# Altium PCB 基于51单片机万年历电子设计系统.PcbDoc
Units mm, origin at the board's own origin, x right, y up, seen from the top; angles counter-clockwise.
Board outline 100 x 100 mm, 2 copper layers (Top Layer, Bottom Layer); 26 components, 36 nets, 141 pads, 6 vias.
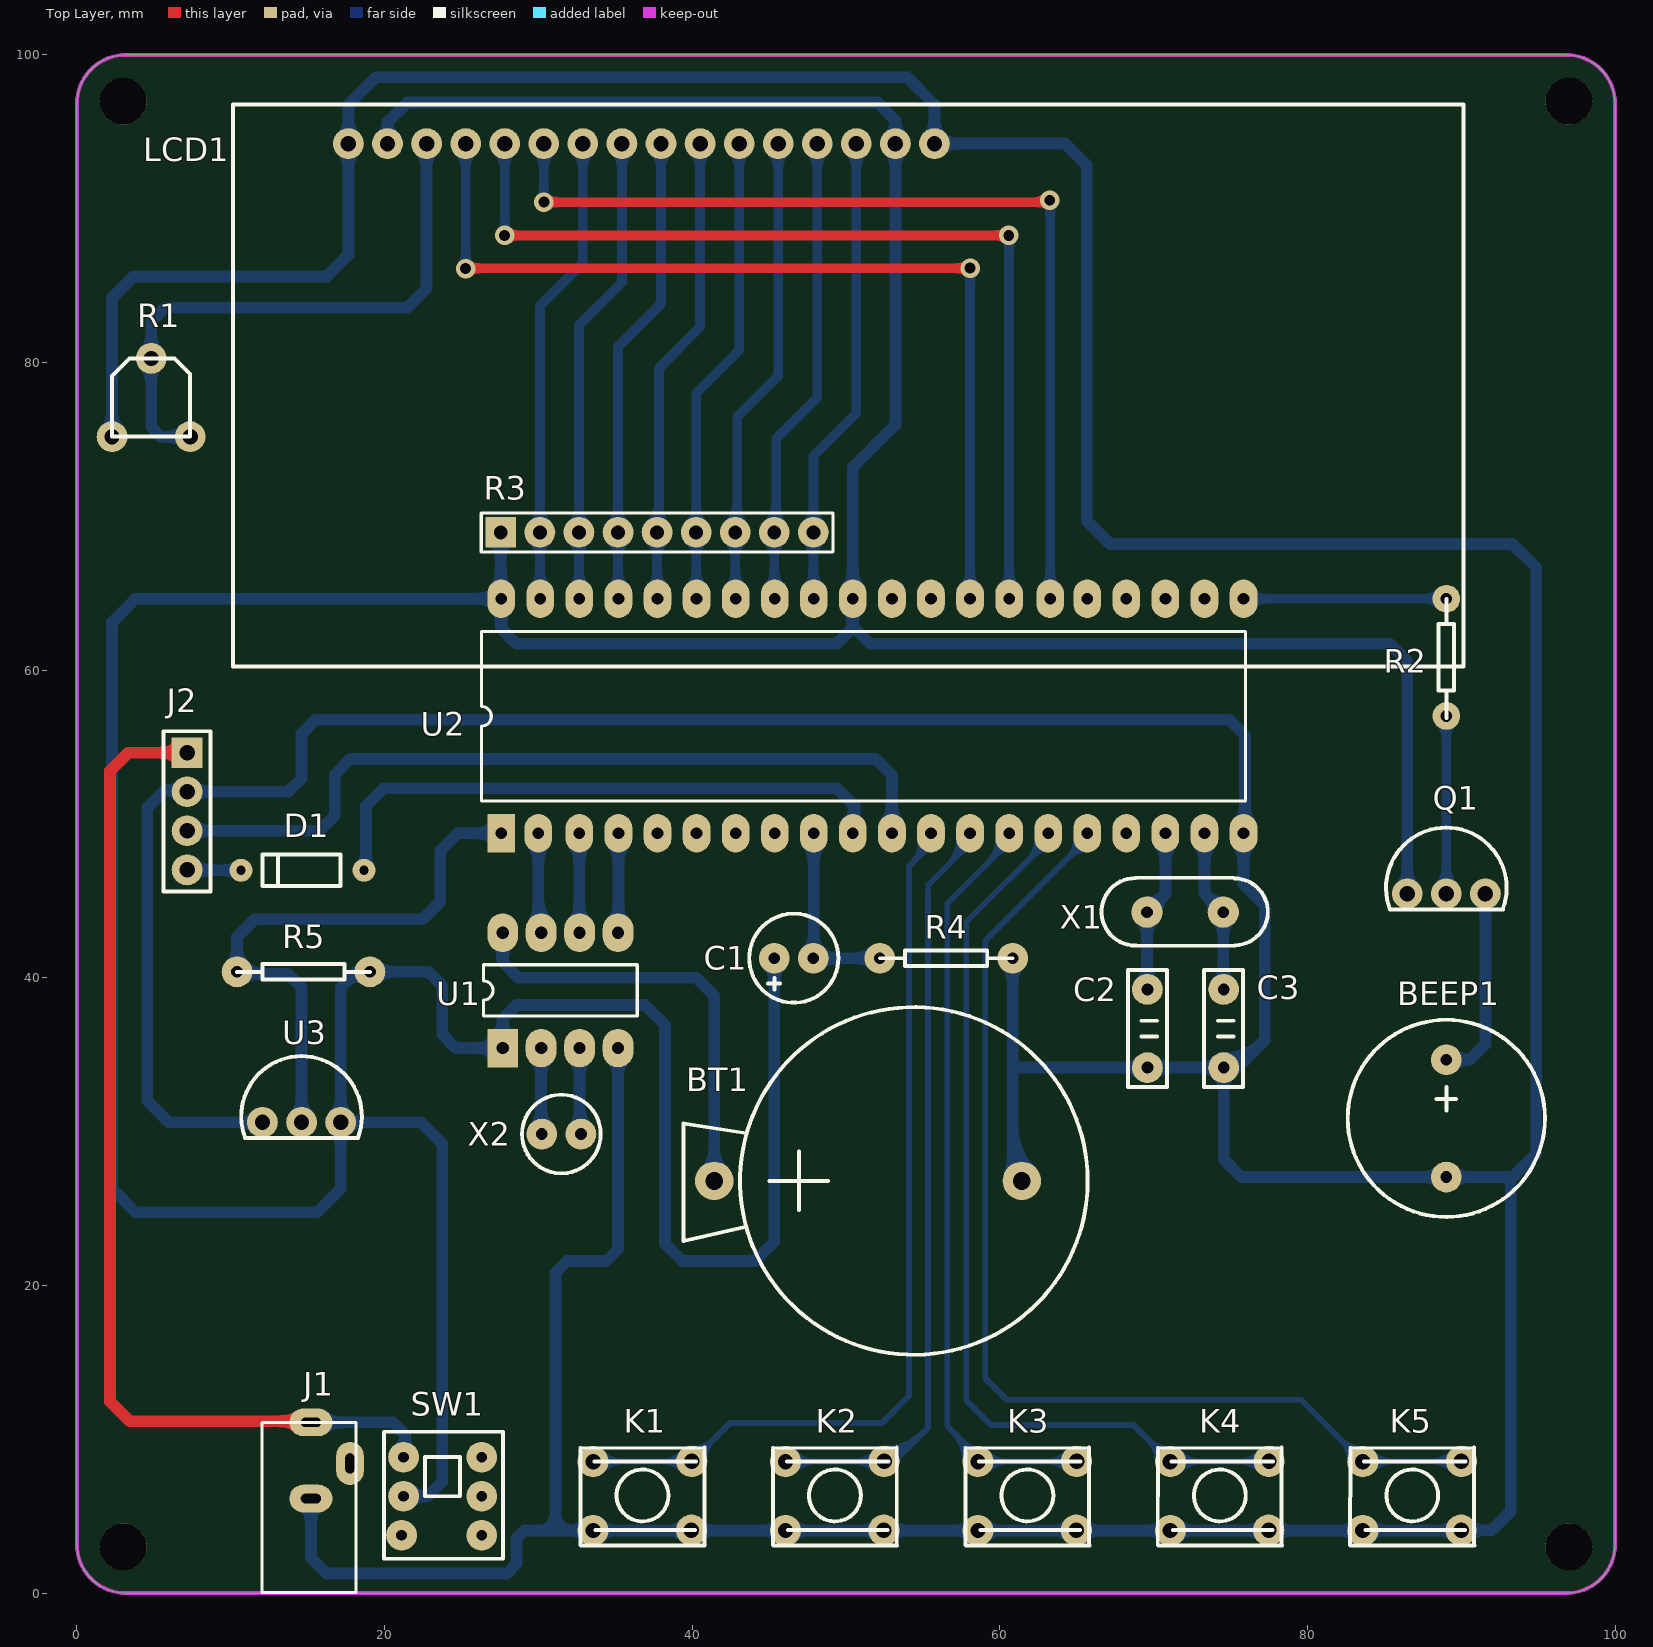
[diagram p0: Top Layer view]
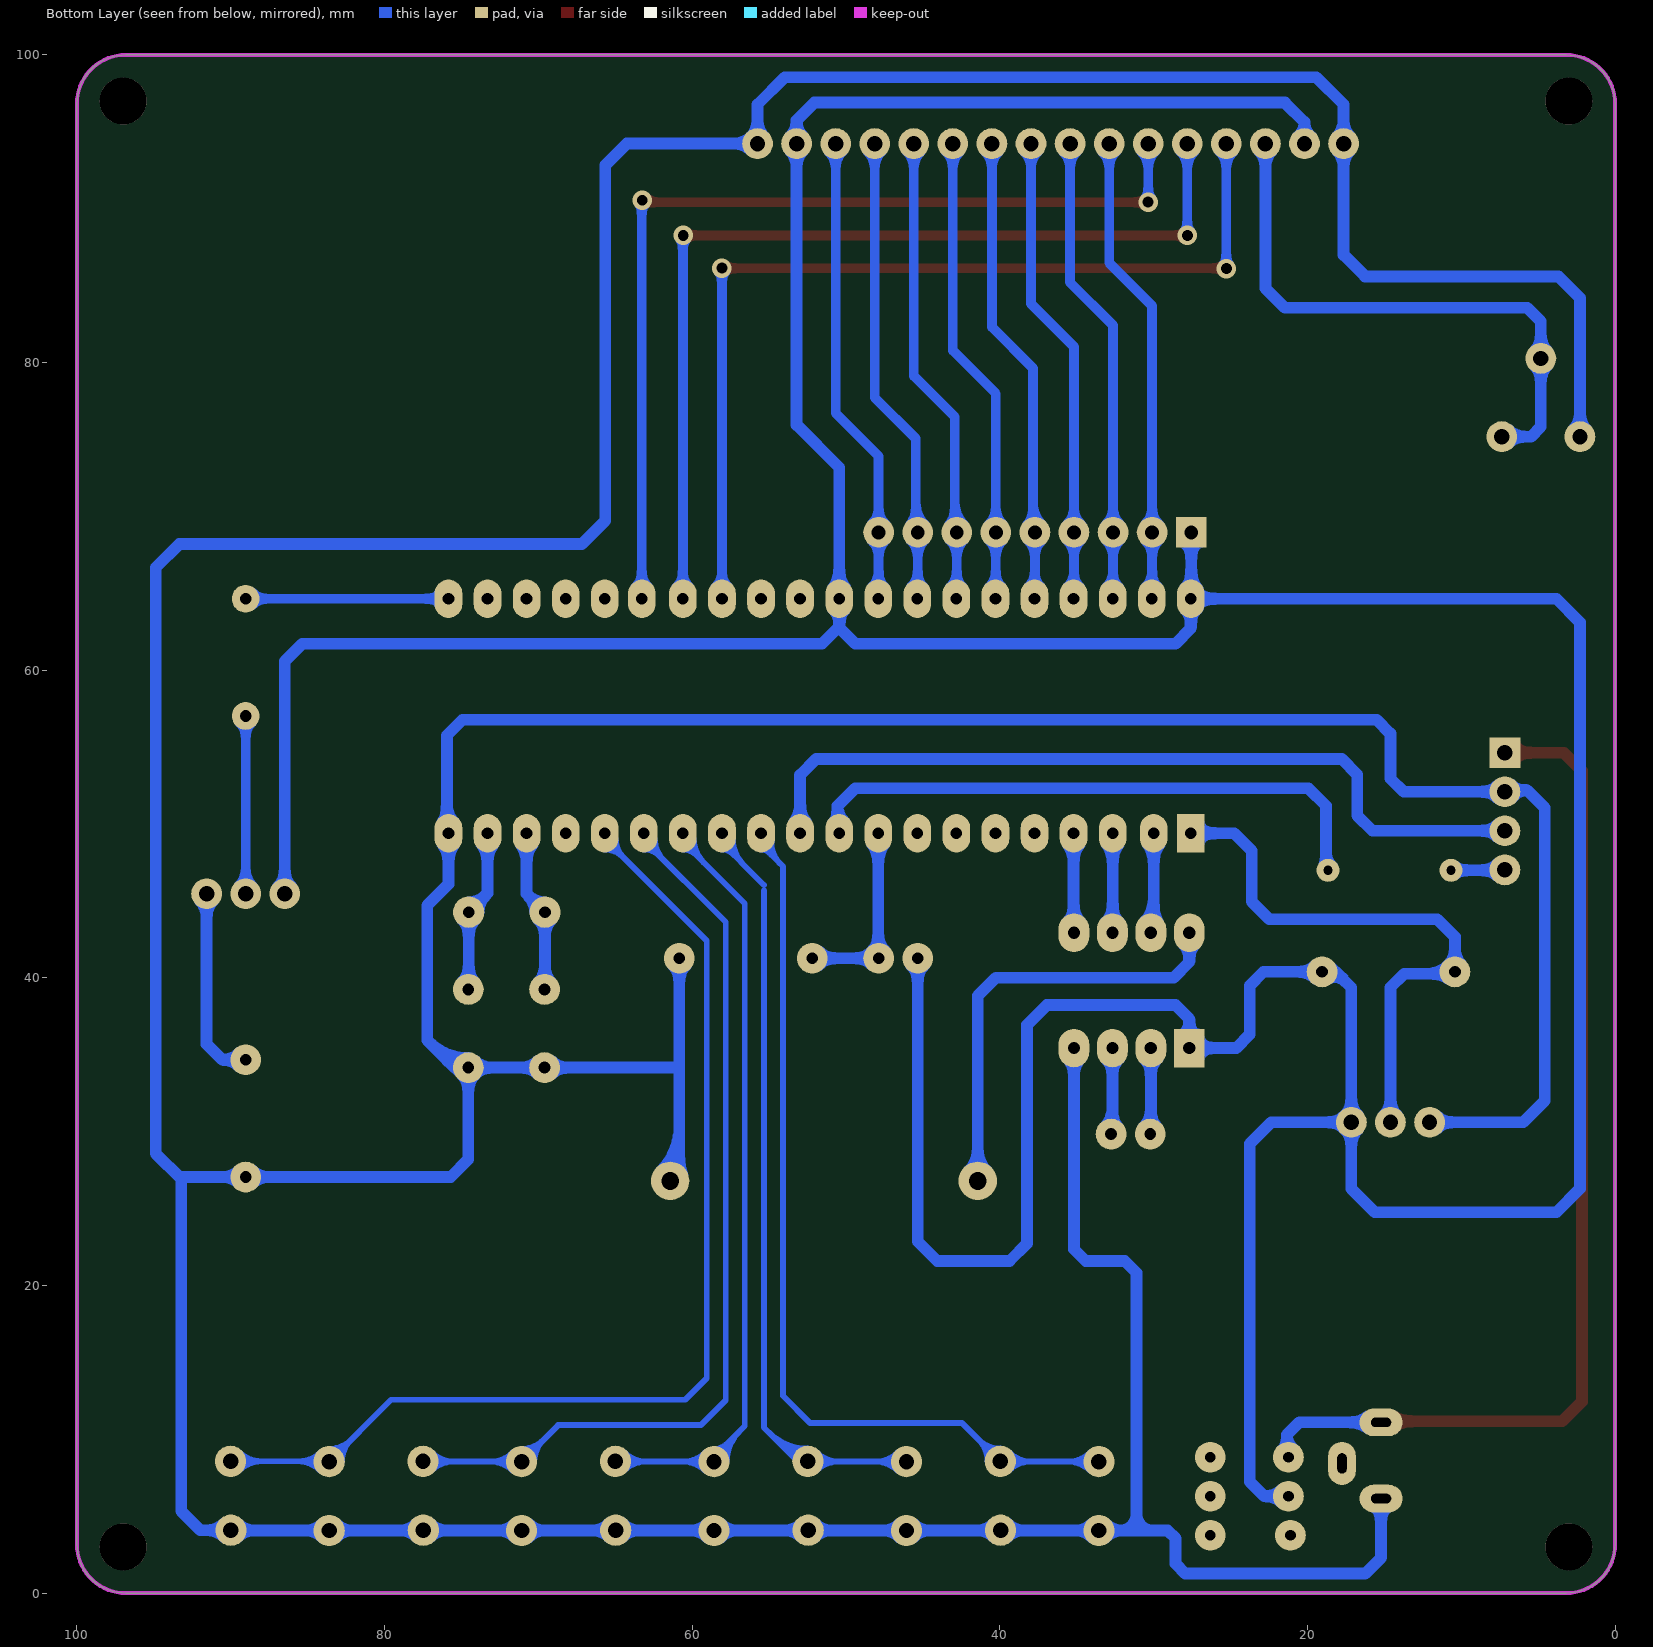
[diagram p1: Bottom Layer view, seen from below]

## Layer stack, top to bottom
Top Layer: signal copper 0.0356
Dielectric: dielectric 0.32, FR-4, Dk 4.8
Bottom Layer: signal copper 0.0356

## Board outline
0,3.175 0,96.825 cw(c3.175,96.825) 3.175,100 96.825,100 cw(c96.825,96.825) 100,96.825 100,3.175 cw(c96.825,3.175) 96.825,0 3.175,0 cw(c3.175,3.175)

## Design rules (kind name [scope] priority, off if disabled: settings)
Clearance [All] p1: gap=0.254
HoleSize [All] p1: absolutevalues=TRUE maxlimit=25.4 minlimit=0.025 maxpercent=80.000 minpercent=20.000
PolygonConnect [All] p1: connectstyle=Relief reliefconductorwidth=0.254 reliefentries=4 polygonreliefangle="90 Angle"
RoutingVias [All] p1: holewidth=0.711 width=1.27 viastyle="Through Hole" minholewidth=0.711 minwidth=1.27 maxholewidth=0.711 maxwidth=1.27
SilkToSilkClearance [All] p1: silktosilkclearance=0
SilkscreenOverComponentPads SilkToSolderMaskClearance [IsPad] p1: minsilkscreentomaskgap=0
SolderMaskExpansion [All] p1: expansion=0.102
Width [All] p1: maxlimit=2.032 minlimit=0.254 preferedwidth=0.635
25 further rules are at their usual default settings.

## Components (designator, comment, footprint, x,y, rotation, side; value= is the part's Value field where it differs from the comment)
BEEP1 "BEEP" BEEP 89.027,34.671 r270 top
BT1 "Battery" CR-2032 51.435,26.797 r0 top
C1 "10uF" CAP_2 45.339,41.275 r0 top
C2 "30pF" CAP 69.596,34.163 r90 top
C3 "30pF" CAP 74.549,34.163 r90 top
D1 "1N4148" 1N4148 18.668,46.99 r180 top
J1 "power" DC3.5 15.215,11.1 r270 top
J2 "SENSOR" SIP4 7.163,54.635 r270 top
K1 "KEY" SW2 36.83,5.588 r0 top
K2 "KEY" SW2 49.34,5.588 r0 top
K3 "KEY" SW2 61.849,5.588 r0 top
K4 "KEY" SW2 74.358,5.588 r0 top
K5 "KEY" SW2 86.868,5.588 r0 top
LCD1 "1602" 1602 17.653,94.234 r0 top
Q1 "S8550" PNP 86.487,45.466 r0 top
R1 "103" RES-B 2.286,75.184 r0 top
R2 "1K" RES#1 89.027,57.023 r90 top
R3 "103" SIP9 27.559,68.961 r0 top
R4 "10K" RES#2 61.595,41.275 r180 top
R5 "4.7K" RES#2 19.812,40.386 r180 top
SW1 "SWT" SWT 21.234,8.839 r0 top
U1 "DS1302" DIP8 27.679,35.433 r90 top
U2 "STC89C52" DIP40 27.584,49.403 r90 top
U3 "DS18B20" DS18B20 14.605,30.607 r0 top
X1 "12M" JZ 72.009,44.323 r180 top
X2 "32.768K" XTAL2 32.766,29.845 r180 top

## Footprints (in the part's own frame and the unit in brackets; to place one, negate y for a bottom-side part, rotate by r counter-clockwise, add the part's x,y. Pads: shape width x height; smd on the part's side, far side on the other; paste and mask are expansions set on the pad)
1N4148 [mm]
  round 1.5 hole 0.6: 1(0,0) 2(8,0)
  silkscreen extent 1.52,-1.02 6.6,1.02
1602 [mm]
  round 2 hole 1: 1(0,0) 2(2.54,0) 3(5.08,0) 4(7.62,0) 5(10.16,0) 6(12.7,0) 7(15.24,0) 8(17.78,0) 9(20.32,0) 10(22.86,0) 11(25.4,0) 12(27.94,0) 13(30.48,0) 14(33.02,0) 15(35.56,0) 16(38.1,0)
  silkscreen extent -7.5,-34 72.5,2.54
BEEP [mm]
  round 2 hole 0.762: 1(0,0) 2(7.62,0)
  silkscreen extent -2.6,-6.41 10.22,6.41
CAP [mm]
  round 2 hole 0.762: 1(0,0) 2(5.08,0)
  silkscreen extent -1.27,-1.27 6.35,1.27
CAP_2 [mm]
  round 2 hole 0.762: 1(0,0) 2(2.54,0)
  silkscreen extent -1.63,-2.89 4.17,2.89
CR-2032 [mm]
  round 2.5 hole 1.15: 1(-10,0) 2(10,0)
  silkscreen extent -12,-11.3 14.28,11.3
DC3.5 [mm]
  oval 1.8x2.8 hole 0.6 slot 1.3 at 90 deg: 1(0,0) 2(4.953,0)
  oval 2.8x1.8 hole 0.6 slot 1.3 at 0 deg: ""(2.667,2.54)
  silkscreen extent 0,-3.17 11.05,2.92
DIP8 [mm]
  rect 2.5x2 hole 0.8: 1(0,0)
  oval 2.5x2 hole 0.8: 2(0,-2.5) 3(0,-5) 4(0,-7.5) 5(7.5,-7.5) 6(7.5,-5) 7(7.5,-2.5) 8(7.5,0)
  silkscreen extent 2.08,-8.75 5.42,1.25
DIP40 [mm]
  rect 2.5x1.8 / inner rect 2.5x1.2 / far side rect 2.5x1.8 hole 0.762: 1(0,0)
  oval 2.5x1.8 / inner oval 2.5x1.2 / far side oval 2.5x1.8 hole 0.762: 2(0,-2.413) 3(0,-5.08) 4(0,-7.62) 5(0,-10.16) 6(0,-12.7) 7(0,-15.24) 8(0,-17.78) 9(0,-20.32) 10(0,-22.86) 11(0,-25.4) 12(0,-27.94) 13(0,-30.48) 14(0,-33.02) 15(0,-35.56) 16(0,-38.1) 17(0,-40.64) 18(0,-43.18) 19(0,-45.72) 20(0,-48.26) 21(15.24,-48.26) 22(15.24,-45.72) 23(15.24,-43.18) 24(15.24,-40.64) 25(15.24,-38.1) 26(15.24,-35.687) 27(15.24,-33.02) 28(15.24,-30.48) 29(15.24,-27.94) 30(15.24,-25.4) 31(15.24,-22.86) 32(15.24,-20.32) 33(15.24,-17.78) 34(15.24,-15.24) 35(15.24,-12.7) 36(15.24,-10.16) 37(15.24,-7.62) 38(15.24,-5.08) 39(15.24,-2.54) 40(15.24,0)
  silkscreen extent 2.08,-48.39 13.12,1.29
DS18B20 [mm]
  round 2 hole 1: 1(-2.54,0) 2(0,0) 3(2.54,0)
  silkscreen extent -3.92,-1.01 3.92,4.3
JZ [mil]
  round 80 hole 30: 1(-99.09,2.16) 2(95.91,2.16)
  silkscreen extent -213,-86 212,88
PNP [mm]
  round 2 hole 1: B(2.54,0) C(5.08,0) E(0,0)
  silkscreen extent -1.38,-1.01 6.46,4.3
RES#1 [mm]
  round 1.8 hole 0.762: 1(0,0) 2(7.62,0)
  silkscreen extent -0.13,-0.51 7.62,0.51
RES#2 [mm]
  round 2 hole 0.762: 1(0.762,0) 2(9.398,0)
  silkscreen extent 0.76,-0.51 9.4,0.51
RES-B [mm]
  round 2 hole 1: 1(0,0) 2(5.08,0) 3(2.54,5.08)
  silkscreen extent 0,0 5.08,5.08
SIP4 [mm]
  rect 2x2 hole 1: 1(0,0)
  round 2 hole 1: 2(2.54,0) 3(5.08,0) 4(7.62,0)
  silkscreen extent -1.4,-1.52 9.02,1.52
SIP9 [mm]
  rect 2x2 hole 0.9: 1(0,0)
  round 2 hole 0.9: 2(2.54,0) 3(5.08,0) 4(7.62,0) 5(10.16,0) 6(12.7,0) 7(15.24,0) 8(17.78,0) 9(20.32,0)
  silkscreen extent -1.27,-1.27 21.59,1.27
SW2 [mm]
  round 2.032 hole 1: 1(-3.27,-1.52) 1(3.12,-1.5) 2(-3.27,2.96) 2(3.14,2.98)
  silkscreen extent -4.09,-2.5 3.98,3.88
SWT [mm]
  round 2 hole 0.7: 1(0,0) 2(0,-2.54) 3(-0.127,-5.08) 4(5.08,-5.08) 5(5.08,-2.54) 6(5.08,0)
  silkscreen extent -1.27,-6.6 6.48,1.65
XTAL2 [mm]
  round 2 hole 0.762: 1(0,0) 2(2.54,0)
  silkscreen extent -1.29,-2.55 3.83,2.55

## Part data
C1: library part CAP_2
C2 C3: library part CAP
J1: library part DC5.5
J2: library part CON4
Q1: library part PNP
R1: library part RES-B
R2 R4 R5: library part Res
R3: library part Header9
X1 X2: library part XTAL

## Free pads (board coordinates)
  round 3.05 hole 3.05: ""(3,3) ""(3,97) ""(97,3) ""(97,97)

## Via types
v1: diameter 1.27, hole 0.711, Top Layer to Bottom Layer, 6 vias

## Nets (pads, with @x,y where several pads share a name; then routed paths per layer and width w, separated by ;. In a path a pad name is that pad's centre, name@x,y a point inside that pad or via, vN(x,y) a via of type N, cw(c..) or ccw(c..) an arc to the next point about the centre after c; other vN are vias at no path point)
+5V: J1.1 J2.1 SW1.1 | length 76.4
  Top Layer w0.762: J2.1@6.725,54.198 ccw(c5.668,53.141) 5.668,54.635 ccw(c5.668,56.13) J2.1@6.725,55.073 ; J2.1 3.327,54.635 2.159,53.467 2.159,12.446 3.429,11.176 15.138,11.176 J1.1 ; 13.278,11.176 cw(c13.278,9.663) J1.1@14.348,10.733 ; 13.646,11.176 ccw(c13.646,12.169) J1.1@14.348,11.467
  Bottom Layer w0.762: J1.1 20.523,11.1 21.336,10.287 ; J1.1@16.082,10.733 cw(c16.968,9.847) 16.968,11.1 cw(c16.968,12.353) J1.1@16.082,11.467 ; SW1.1@20.861,9.333 ccw(c20.14,10.287) 21.336,10.287 ; SW1.1 21.336,8.941 21.336,10.287 ; 21.336,10.088 ccw(c22.484,10.088) SW1.1@21.672,9.277
BEEP: R2.2 U2.21 | length 17.6
  Bottom Layer w0.635: U2.21 R2.2 ; U2.21@76.256,64.231 cw(c77.251,63.237) 77.251,64.643 cw(c77.251,66.049) U2.21@76.256,65.055 ; R2.2@88.615,64.231 ccw(c87.621,63.237) 87.621,64.643 ccw(c87.621,66.049) R2.2@88.615,65.055
DQ: R5.2 U2.1 U3.2 | length 46.6
  Bottom Layer w0.762: R5.2@9.976,40.824 ccw(c8.92,41.88) 10.414,41.88 ccw(c11.908,41.88) 10.852,40.824 ccw(c12.215,42.187) 12.215,40.259 ; R5.2@10.852,39.948 cw(c11.602,39.198) 11.602,40.259 ; U3.2@14.167,31.045 ccw(c13.111,32.101) 14.605,32.101 ccw(c16.099,32.101) U3.2@15.043,31.045 ; U3.2 14.605,39.37 13.716,40.259 10.541,40.259 R5.2 10.414,42.672 11.557,43.815 22.479,43.815 23.622,44.958 23.622,48.26 24.765,49.403 U2.1 ; U2.1@27.217,49.036 ccw(c26.331,48.15) 26.331,49.403 ccw(c26.331,50.656) U2.1@27.217,49.77
EN: LCD1.6 U2.26 | length 72
  Top Layer w0.635: v1(30.353,90.424) v1@63.271,90.424 ; v1@30.578,90.199 cw(c31.12,89.657) 31.12,90.424 cw(c31.12,91.191) v1@30.578,90.649 ; 62.173,90.424 ccw(c62.173,91.624) v1@63.021,90.776
  Bottom Layer w0.635: LCD1.6@29.87,93.751 cw(c28.705,92.586) 30.353,92.586 cw(c32.001,92.586) LCD1.6@30.836,93.751 ; v1@30.128,90.649 ccw(c29.586,91.191) 30.353,91.191 ccw(c31.12,91.191) v1@30.578,90.649 ; v1(30.353,90.424) LCD1.6 ; U2.26@62.86,65.405 ccw(c61.865,66.399) 63.271,66.399 ccw(c64.678,66.399) U2.26@63.683,65.405 ; v1@63.021,90.326 cw(c62.418,89.723) 63.271,89.723 ; v1(63.246,90.551) 63.271,90.526 U2.26 ; 63.271,89.846 cw(c63.951,89.846) v1@63.471,90.326
GND: BEEP1.2 BT1.2 C2.1 C3.1 J1.2 J2.2 K1.1 K2.1 K3.1 K4.1 K5.1 LCD1.1 LCD1.16 R1.1 R4.1 U1.4 U2.20 U3.1 | length 607.9
  Bottom Layer w0.762: R1.1@1.848,75.622 ccw(c0.792,76.678) 2.286,76.678 ccw(c3.78,76.678) R1.1@2.724,75.622 ; R1.1 2.286,84.201 3.683,85.598 16.256,85.598 17.653,86.995 LCD1.1 17.653,96.774 19.431,98.552 53.975,98.552 55.753,96.774 LCD1.16 64.262,94.234 65.659,92.837 65.659,69.723 67.183,68.199 93.345,68.199 94.869,66.675 94.869,28.575 93.218,26.924 93.218,5.334 91.972,4.088 89.988,4.088 89.968,4.068 83.598,4.068 K1.1@33.56,4.068 ; 5.914,52.197 ccw(c5.914,53.345) J2.2@6.725,52.533 ; J2.2@6.669,51.722 ccw(c5.715,51.001) 5.715,52.197 ; J2.2@7.6,51.658 cw(c8.657,50.601) 8.657,52.095 cw(c8.657,53.59) J2.2@7.6,52.533 ; U3.1@11.627,30.169 ccw(c10.571,29.113) 10.571,30.607 ccw(c10.571,32.101) U3.1@11.627,31.045 ; U3.1 5.969,30.607 4.572,32.004 4.572,51.054 5.715,52.197 ; J1.2@14.848,5.78 cw(c13.962,4.894) 15.215,4.894 cw(c16.468,4.894) J1.2@15.582,5.78 ; J1.2 15.215,2.311 16.256,1.27 27.94,1.27 28.575,1.905 28.575,3.556 29.087,4.068 31.115,4.068 ; LCD1.1@17.215,93.796 cw(c16.159,92.74) 17.653,92.74 cw(c19.147,92.74) LCD1.1@18.091,93.796 ; LCD1.1@17.215,94.672 ccw(c16.159,95.728) 17.653,95.728 ccw(c19.147,95.728) LCD1.1@18.091,94.672 ; K1.1@33.111,3.619 ccw(c32.027,2.535) 32.027,4.068 ccw(c32.027,5.601) K1.1@33.111,4.517 ; K1.1@34.009,3.619 cw(c35.093,2.535) 35.093,4.068 cw(c35.093,5.601) K1.1@34.009,4.517 ; K1.1@34.011,3.621 cw(c35.084,2.557) 35.084,4.068 ; K1.1@34.011,4.515 ccw(c35.084,5.579) 35.084,4.068 ; U1.4@34.741,34.745 cw(c33.685,33.689) 35.179,33.689 cw(c36.673,33.689) U1.4@35.617,34.745 ; U1.4 35.179,22.352 34.417,21.59 31.877,21.59 31.115,20.828 31.115,4.068 ; 38.369,4.068 ccw(c38.369,5.669) K1.1@39.501,4.537 ; 38.465,4.068 cw(c38.465,2.603) K1.1@39.501,3.639 ; K1.1@40.399,3.639 cw(c41.435,2.603) 41.435,4.068 ; K1.1@40.399,4.537 ccw(c41.531,5.669) 41.531,4.068 ; K2.1@45.62,3.619 ccw(c44.536,2.535) 44.536,4.068 ccw(c44.536,5.601) K2.1@45.62,4.517 ; K2.1@46.519,3.619 cw(c47.603,2.535) 47.603,4.068 cw(c47.603,5.601) K2.1@46.519,4.517 ; 50.878,4.068 ccw(c50.878,5.669) K2.1@52.01,4.537 ; 50.975,4.068 cw(c50.975,2.603) K2.1@52.01,3.639 ; K2.1@52.909,3.639 cw(c53.944,2.603) 53.944,4.068 ; K2.1@52.909,4.537 ccw(c54.041,5.669) 54.041,4.068 ; LCD1.16@55.315,94.672 ccw(c54.259,95.728) 55.753,95.728 ccw(c57.247,95.728) 56.191,94.672 ccw(c57.247,95.728) 57.247,94.234 ccw(c57.247,92.74) LCD1.16@56.191,93.796 ; K3.1@58.13,3.619 ccw(c57.046,2.535) 57.046,4.068 ccw(c57.046,5.601) K3.1@58.13,4.517 ; K3.1@59.028,3.619 cw(c60.112,2.535) 60.112,4.068 cw(c60.112,5.601) K3.1@59.028,4.517 ; R4.1@60.395,40.837 cw(c59.339,39.781) 60.833,39.781 cw(c62.327,39.781) R4.1@61.271,40.837 ; 60.833,28.509 ccw(c63.147,28.509) BT1.2@61.511,26.873 ; 60.833,30.348 ccw(c64.986,30.348) BT1.2@62.049,27.411 ; R4.1 60.833,34.036 ; BT1.2 60.833,27.399 60.833,34.036 ; 63.388,4.068 ccw(c63.388,5.669) K3.1@64.52,4.537 ; 63.484,4.068 cw(c63.484,2.603) K3.1@64.52,3.639 ; K3.1@65.418,3.639 cw(c66.454,2.603) 66.454,4.068 ; K3.1@65.418,4.537 ccw(c66.55,5.669) 66.55,4.068 ; C2.1@69.158,33.725 ccw(c68.102,32.669) 68.102,34.163 ccw(c68.102,35.657) C2.1@69.158,34.601 ; C2.1@70.034,33.725 cw(c71.09,32.669) 71.09,34.163 cw(c71.09,35.657) C2.1@70.034,34.601 ; K4.1@70.639,3.619 ccw(c69.555,2.535) 69.555,4.068 ccw(c69.555,5.601) K4.1@70.639,4.517 ; K4.1@71.538,3.619 cw(c72.622,2.535) 72.622,4.068 cw(c72.622,5.601) K4.1@71.538,4.517 ; C3.1@74.111,34.601 cw(c73.055,35.657) 73.055,34.163 cw(c73.055,32.669) 74.111,33.725 cw(c73.055,32.669) 74.549,32.669 cw(c76.043,32.669) C3.1@74.987,33.725 ; C3.1@74.549,34.02 ccw(c74.549,35.821) 75.823,34.548 ; C3.1@74.549,34.782 ccw(c74.549,38.423) 77.123,35.848 ; U2.20@75.477,48.686 cw(c74.591,47.8) 75.844,47.8 cw(c77.097,47.8) U2.20@76.211,48.686 ; U2.20@75.477,50.12 ccw(c74.346,51.251) 75.946,51.251 ; 75.897,4.068 ccw(c75.897,5.669) K4.1@77.029,4.537 ; 75.946,50.761 ccw(c76.852,50.761) U2.20@76.211,50.12 ; 75.994,4.068 cw(c75.994,2.603) K4.1@77.029,3.639 ; K4.1@77.928,3.639 cw(c78.963,2.603) 78.963,4.068 ; K4.1@77.928,4.537 ccw(c79.06,5.669) 79.06,4.068 ; K5.1@83.149,3.619 ccw(c82.065,2.535) 82.065,4.068 ccw(c82.065,5.601) K5.1@83.149,4.517 ; K5.1@84.047,3.619 cw(c85.131,2.535) 85.131,4.068 cw(c85.131,5.601) K5.1@84.047,4.517 ; 88.407,4.068 ccw(c88.407,5.669) K5.1@89.539,4.537 ; 88.503,4.068 cw(c88.503,2.603) K5.1@89.539,3.639 ; BEEP1.2@88.589,26.613 ccw(c87.533,25.557) 87.533,27.051 ccw(c87.533,28.545) BEEP1.2@88.589,27.489 ; BEEP1.2@89.465,26.613 cw(c90.521,25.557) 90.521,27.051 cw(c90.521,28.545) BEEP1.2@89.465,27.489 ; K5.1@90.437,3.639 cw(c91.521,2.555) 91.521,4.088 cw(c91.521,5.621) K5.1@90.437,4.537 ; 93.091,27.051 BEEP1.2 75.692,27.051 74.549,28.194 C3.1 ; 5.715,52.197 7.061,52.197 J2.2 13.741,52.095 14.605,52.959 14.605,55.88 15.494,56.769 74.93,56.769 75.946,55.753 75.946,49.505 U2.20 75.844,46.076 77.216,44.704 77.216,35.941 75.438,34.163 C3.1 ; 31.115,4.068 K1.1@33.56,4.068 ; K1.1@33.56,4.068 35.084,4.068 ; 60.833,34.036 60.96,34.163 C2.1 C3.1
IO: U1.6 U2.3 | length 10.8
  Bottom Layer w0.762: U1.6@32.241,43.621 ccw(c31.22,44.642) 32.664,44.642 ; U2.3@32.297,48.686 cw(c31.411,47.8) 32.664,47.8 cw(c33.917,47.8) U2.3@33.031,48.686 ; 32.664,44.713 ccw(c34.209,44.713) U1.6@33.117,43.621 ; U2.3 32.664,42.948 U1.6
KEY1: K1.2 U2.12 | length 77.4
  Bottom Layer w0.381: K1.2@33.56,8.548 39.95,8.548 K1.2@39.97,8.568 ; K1.2@33.874,8.234 cw(c34.633,7.475) 34.633,8.548 cw(c34.633,9.621) K1.2@33.874,8.862 ; K1.2@34.144,7.964 cw(c35.553,6.555) 35.553,8.548 cw(c35.553,10.541) K1.2@34.144,9.132 ; 37.929,8.548 ccw(c37.929,10.609) K1.2@39.386,9.152 ; 38.025,8.548 cw(c38.025,6.623) K1.2@39.386,7.984 ; 38.849,8.548 ccw(c38.849,9.689) K1.2@39.656,8.882 ; 38.945,8.548 cw(c38.945,7.543) K1.2@39.656,8.254 ; K1.2@39.97,9.013 ccw(c39.97,10.086) 40.729,9.327 ccw(c41.488,8.568) K1.2@40.414,8.568 ; K1.2@39.97,9.394 ccw(c39.97,11.386) 41.379,9.977 ccw(c42.788,8.568) K1.2@40.795,8.568 ; K1.2@40.029,8.568 K1.2@39.97,8.568 ; 54.295,47.437 ccw(c52.994,48.739) U2.12@54.82,48.966 ; 54.847,47.989 ccw(c53.975,48.86) U2.12@55.198,49.012 ; 54.973,48.115 cw(c55.524,47.564) U2.12@55.524,48.343 ; U2.12 55.524,48.666 54.102,47.244 54.102,12.827 52.324,11.049 42.451,11.049 K1.2@39.97,8.568
KEY2: K2.2 U2.13 | length 70.9
  Bottom Layer w0.381: K2.2@46.07,8.548 52.459,8.548 52.479,8.568 53.145,8.568 55.34,10.763 55.34,44.196 ; K2.2@46.384,8.234 cw(c47.143,7.475) 47.143,8.548 cw(c47.143,9.621) K2.2@46.384,8.862 ; K2.2@46.653,7.964 cw(c48.062,6.555) 48.062,8.548 cw(c48.062,10.541) K2.2@46.653,9.132 ; 50.438,8.548 ccw(c50.438,10.609) K2.2@51.896,9.152 ; 50.535,8.548 cw(c50.535,6.623) K2.2@51.896,7.984 ; 51.358,8.548 ccw(c51.358,9.689) K2.2@52.165,8.882 ; 51.455,8.548 cw(c51.455,7.543) K2.2@52.165,8.254 ; K2.2@52.479,8.632 ccw(c52.479,10.391) 53.724,9.147 ; K2.2@52.479,9.013 ccw(c52.479,11.692) 54.374,9.797 ; K2.2@52.479,9.394 ccw(c52.479,12.993) 55.025,10.448 ; 55.34,45.339 55.34,44.196 ; 55.34,45.688 55.34,44.196 ; 55.34,46.038 U2.13@58.064,48.762 ; 56.647,47.344 ccw(c54.939,49.053) U2.13@57.355,49.053 ; 57.298,47.995 ccw(c56.239,49.053) U2.13@57.736,49.053 ; 57.351,48.048 cw(c58.064,47.334) U2.13@58.064,48.343 ; U2.13@58.064,48.412 U2.13
KEY3: K3.2 U2.14 | length 67.7
  Bottom Layer w0.381: 56.578,43.815 56.578,42.799 ; 56.578,44.767 56.578,42.799 ; 56.578,44.831 U2.14@60.604,48.857 ; 56.951,10.486 cw(c55.012,8.548) K3.2@57.754,8.548 ; 57.601,9.836 cw(c56.313,8.548) K3.2@58.135,8.548 ; 57.699,9.738 ccw(c58.579,10.618) K3.2@58.579,9.373 ; K3.2@58.579,8.548 58.579,8.858 56.578,10.858 56.578,42.799 ; K3.2@58.893,8.234 cw(c59.652,7.475) 59.652,8.548 cw(c59.652,9.621) K3.2@58.893,8.862 ; K3.2@59.163,7.964 cw(c60.572,6.555) 60.572,8.548 cw(c60.572,10.541) K3.2@59.163,9.132 ; 59.255,47.507 ccw(c57.709,49.053) U2.14@59.895,49.053 ; K3.2@59.524,8.548 64.969,8.548 K3.2@64.989,8.568 ; 59.728,47.98 cw(c60.604,47.104) U2.14@60.604,48.343 ; 59.905,48.157 ccw(c59.009,49.053) U2.14@60.276,49.053 ; U2.14@60.604,48.793 U2.14 ; 62.948,8.548 ccw(c62.948,10.609) K3.2@64.405,9.152 ; 63.044,8.548 cw(c63.044,6.623) K3.2@64.405,7.984 ; 63.868,8.548 ccw(c63.868,9.689) K3.2@64.675,8.882 ; 63.964,8.548 cw(c63.964,7.543) K3.2@64.675,8.254
KEY4: K4.2 U2.15 | length 80
  Bottom Layer w0.381: 57.817,13.335 57.817,14.478 ; 57.817,42.672 57.817,42.164 ; 57.817,43.593 57.817,42.164 ; 57.817,43.624 U2.15@63.144,48.952 ; 61.862,47.67 ccw(c60.479,49.053) U2.15@62.435,49.053 ; 62.105,47.913 cw(c63.144,46.874) U2.15@63.144,48.343 ; 62.512,48.32 ccw(c61.779,49.053) U2.15@62.816,49.053 ; U2.15@63.144,48.92 U2.15 ; K4.2@70.263,8.548 ccw(c68.27,8.548) 69.679,9.957 ccw(c71.089,11.366) K4.2@71.089,9.373 ; K4.2@70.644,8.548 ccw(c69.571,8.548) 70.33,9.307 ccw(c71.089,10.066) K4.2@71.089,8.992 ; K4.2@71.403,8.234 cw(c72.162,7.475) 72.162,8.548 cw(c72.162,9.621) K4.2@71.403,8.862 ; K4.2@71.672,7.964 cw(c73.081,6.555) 73.081,8.548 cw(c73.081,10.541) K4.2@71.672,9.132 ; 75.457,8.548 ccw(c75.457,10.609) K4.2@76.915,9.152 ; 75.554,8.548 cw(c75.554,6.623) K4.2@76.915,7.984 ; 76.377,8.548 ccw(c76.377,9.689) K4.2@77.184,8.882 ; 76.474,8.548 cw(c76.474,7.543) K4.2@77.184,8.254 ; K4.2@77.498,8.568 77.478,8.548 71.089,8.548 68.714,10.922 59.436,10.922 57.817,12.541 57.817,14.478 ; 57.817,14.478 57.817,42.164
KEY5: K5.2 U2.16 | length 88.5
  Bottom Layer w0.381: 64.469,47.832 ccw(c63.249,49.053) U2.16@64.975,49.053 ; 64.483,47.846 cw(c65.684,46.644) U2.16@65.684,48.343 ; U2.16 65.684,49.047 59.055,42.418 59.055,13.97 60.452,12.573 79.573,12.573 83.598,8.548 83.618,8.568 K5.2@90.008,8.568 ; K5.2@82.773,8.548 ccw(c80.78,8.548) 82.189,9.957 ccw(c83.598,11.366) K5.2@83.598,9.373 ; K5.2@83.154,8.548 ccw(c82.08,8.548) 82.839,9.307 ccw(c83.598,10.066) K5.2@83.598,8.992 ; K5.2@83.912,8.234 cw(c84.719,7.427) 84.719,8.568 ; K5.2@83.912,8.862 ccw(c84.623,9.573) 84.623,8.568 ; K5.2@84.182,7.964 cw(c85.639,6.507) 85.639,8.568 ; K5.2@84.182,9.132 ccw(c85.543,10.493) 85.543,8.568 ; K5.2@89.424,7.984 ccw(c88.015,6.575) 88.015,8.568 ccw(c88.015,10.561) K5.2@89.424,9.152 ; K5.2@89.694,8.254 ccw(c88.935,7.495) 88.935,8.568 ccw(c88.935,9.641) K5.2@89.694,8.882
NetBEEP1_1: BEEP1.1 Q1.C | length 17.4
  Bottom Layer w0.762: BEEP1.1 90.551,34.671 91.567,35.687 Q1.C ; BEEP1.1@89.465,34.233 cw(c90.521,33.177) 90.521,34.671 cw(c90.521,36.165) BEEP1.1@89.465,35.109 ; Q1.C@91.129,45.028 cw(c90.073,43.972) 91.567,43.972 cw(c93.061,43.972) Q1.C@92.005,45.028
NetBT1_1: BT1.1 U1.8 | length 34.2
  Bottom Layer w0.762: U1.8@27.241,42.245 cw(c26.185,41.189) 27.679,41.189 cw(c29.173,41.189) U1.8@28.117,42.245 ; U1.8 27.679,41.028 28.695,40.012 40.252,40.012 41.435,38.829 BT1.1 ; BT1.1@40.821,27.411 ccw(c39.337,28.895) 41.435,28.895 ccw(c43.533,28.895) BT1.1@42.049,27.411
NetC1_2: C1.2 R4.2 U2.9 | length 21.5
  Bottom Layer w0.762: C1.2@47.441,41.713 ccw(c46.323,42.831) 47.904,42.831 ; U2.9@47.537,48.686 cw(c46.651,47.8) 47.904,47.8 cw(c49.157,47.8) U2.9@48.271,48.686 ; 47.904,42.708 ccw(c49.312,42.708) 48.317,41.713 ccw(c49.373,42.769) 49.373,41.275 ccw(c49.373,39.781) C1.2@48.317,40.837 ; U2.9 47.904,41.3 C1.2 R4.2 ; R4.2@51.759,40.837 ccw(c50.703,39.781) 50.703,41.275 ccw(c50.703,42.769) R4.2@51.759,41.713
NetC2_2: C2.2 U2.18 X1.2 | length 19.8
  Bottom Layer w0.762: X1.2@69.124,43.819 cw(c68.04,42.735) 69.573,42.735 cw(c71.106,42.735) X1.2@70.022,43.819 ; C2.2@69.158,39.681 ccw(c68.157,40.682) 69.573,40.682 ; 69.573,40.793 ccw(c71.146,40.793) C2.2@70.034,39.681 ; X1.2@69.573,44.903 ccw(c69.573,46.436) 70.657,45.352 ccw(c71.741,44.268) X1.2@70.208,44.268 ; C2.2 69.573,39.266 X1.2 70.764,45.459 U2.18 ; U2.18@70.397,48.686 cw(c69.511,47.8) 70.764,47.8 cw(c72.017,47.8) U2.18@71.131,48.686
NetC3_2: C3.2 U2.19 X1.1 | length 19.8
  Bottom Layer w0.762: U2.19@72.937,48.686 cw(c72.051,47.8) 73.304,47.8 cw(c74.557,47.8) U2.19@73.671,48.686 ; U2.19 73.304,45.49 X1.1 74.526,39.266 C3.2 ; X1.1@73.891,44.268 ccw(c72.358,44.268) 73.442,45.352 ccw(c74.526,46.436) X1.1@74.526,44.903 ; X1.1@74.077,43.819 cw(c72.993,42.735) 74.526,42.735 cw(c76.059,42.735) X1.1@74.975,43.819 ; C3.2@74.111,39.681 ccw(c73.11,40.682) 74.526,40.682 ; 74.526,40.793 ccw(c76.099,40.793) C3.2@74.987,39.681
NetD1_2: D1.2 J2.4 | length 7.3
  Bottom Layer w0.635: J2.4 J2.4@7.188,46.99
  Bottom Layer w0.762: J2.4@7.188,46.99 D1.2 ; J2.4@7.6,46.578 cw(c8.596,45.582) 8.596,46.99 ; J2.4@7.6,47.453 ccw(c8.719,48.571) 8.719,46.99 ; D1.2@10.407,46.729 ccw(c9.777,46.099) 9.777,46.99 ccw(c9.777,47.881) D1.2@10.407,47.251
NetLCD1_3: LCD1.3 R1.2 R1.3 | length 47.2
  Bottom Layer w0.762: R1.3@4.388,79.826 cw(c3.332,78.77) 4.826,78.77 cw(c6.32,78.77) R1.3@5.264,79.826 ; R1.3@4.388,80.702 ccw(c3.332,81.758) 4.826,81.758 ccw(c6.32,81.758) R1.3@5.264,80.702 ; R1.2@6.928,74.746 ccw(c5.872,73.69) 5.872,75.184 ccw(c5.872,76.678) R1.2@6.928,75.622 ; R1.2 5.461,75.184 4.826,75.819 R1.3 4.826,82.677 5.715,83.566 21.463,83.566 22.733,84.836 LCD1.3 ; LCD1.3@22.295,93.796 cw(c21.239,92.74) 22.733,92.74 cw(c24.227,92.74) LCD1.3@23.171,93.796
NetQ1_B: Q1.B R2.1 | length 16.4
  Bottom Layer w0.635: Q1.B@88.544,45.949 ccw(c87.379,47.114) 89.027,47.114 ccw(c90.675,47.114) Q1.B@89.51,45.949 ; R2.1@88.615,56.611 cw(c87.621,55.617) 89.027,55.617 cw(c90.433,55.617) R2.1@89.439,56.611 ; Q1.B R2.1
NetU1_2: U1.2 X2.2 | length 10.3
  Bottom Layer w0.762: U1.2@29.741,34.745 cw(c28.685,33.689) 30.179,33.689 cw(c31.673,33.689) U1.2@30.617,34.745 ; X2.2@29.788,30.283 ccw(c28.845,31.226) 30.179,31.226 ; 30.179,31.453 ccw(c31.834,31.453) X2.2@30.664,30.283 ; U1.2 30.179,29.892 X2.2
NetU1_3: U1.3 X2.1 | length 10.3
  Bottom Layer w0.762: U1.3@32.241,34.745 cw(c31.185,33.689) 32.679,33.689 cw(c34.173,33.689) U1.3@33.117,34.745 ; X2.1@32.328,30.283 ccw(c31.482,31.129) 32.679,31.129 ; 32.679,31.549 ccw(c34.47,31.549) X2.1@33.204,30.283 ; U1.3 32.679,29.932 X2.1
P00: LCD1.7 R3.2 U2.39 | length 40.7
  Bottom Layer w0.635: R3.2@29.616,68.478 cw(c28.451,67.313) 30.099,67.313 cw(c31.747,67.313) R3.2@30.582,68.478 ; R3.2@29.616,69.444 ccw(c28.451,70.609) 30.099,70.609 ccw(c31.747,70.609) R3.2@30.582,69.444 ; U2.39@29.713,65.405 ccw(c28.779,66.338) 30.099,66.338 ; 30.099,66.461 ccw(c31.592,66.461) U2.39@30.536,65.405 ; U2.39 30.099,64.668 R3.2 30.099,83.693 32.893,86.487 LCD1.7 ; LCD1.7@32.41,93.751 cw(c31.245,92.586) 32.893,92.586 cw(c34.541,92.586) LCD1.7@33.376,93.751
P01: LCD1.8 R3.3 U2.38 | length 40.7
  Bottom Layer w0.635: R3.3@32.156,68.478 cw(c30.991,67.313) 32.639,67.313 cw(c34.287,67.313) R3.3@33.122,68.478 ; R3.3@32.156,69.444 ccw(c30.991,70.609) 32.639,70.609 ccw(c34.287,70.609) R3.3@33.122,69.444 ; U2.38@32.253,65.405 ccw(c31.319,66.338) 32.639,66.338 ; 32.639,66.461 ccw(c34.132,66.461) U2.38@33.076,65.405 ; U2.38 32.639,64.668 R3.3 32.639,82.423 35.433,85.217 LCD1.8 ; LCD1.8@34.95,93.751 cw(c33.785,92.586) 35.433,92.586 cw(c37.081,92.586) LCD1.8@35.916,93.751
P02: LCD1.9 R3.4 U2.37 | length 40.7
  Bottom Layer w0.635: R3.4@34.696,68.478 cw(c33.531,67.313) 35.179,67.313 cw(c36.827,67.313) R3.4@35.662,68.478 ; R3.4@34.696,69.444 ccw(c33.531,70.609) 35.179,70.609 ccw(c36.827,70.609) R3.4@35.662,69.444 ; U2.37@34.793,65.405 ccw(c33.859,66.338) 35.179,66.338 ; 35.179,66.461 ccw(c36.672,66.461) U2.37@35.616,65.405 ; U2.37 35.179,64.668 R3.4 35.179,81.026 37.973,83.82 LCD1.9 ; LCD1.9@37.49,93.751 cw(c36.325,92.586) 37.973,92.586 cw(c39.621,92.586) LCD1.9@38.456,93.751
P03: LCD1.10 R3.5 U2.36 | length 40.7
  Bottom Layer w0.635: R3.5@37.236,68.478 cw(c36.071,67.313) 37.719,67.313 cw(c39.367,67.313) R3.5@38.202,68.478 ; R3.5@37.236,69.444 ccw(c35.765,70.915) 37.846,70.915 ; U2.36@37.333,65.405 ccw(c36.399,66.338) 37.719,66.338 ; 37.719,66.461 ccw(c39.212,66.461) U2.36@38.156,65.405 ; U2.36 37.719,64.668 R3.5 37.846,69.088 37.846,79.629 40.513,82.296 LCD1.10 ; 37.846,70.302 ccw(c39.06,70.302) R3.5@38.202,69.444 ; LCD1.10@40.03,93.751 cw(c38.865,92.586) 40.513,92.586 cw(c42.161,92.586) LCD1.10@40.996,93.751
P04: LCD1.11 R3.6 U2.35 | length 40.7
  Bottom Layer w0.635: R3.6@39.776,68.478 cw(c38.611,67.313) 40.259,67.313 cw(c41.907,67.313) R3.6@40.742,68.478 ; R3.6@39.776,69.444 ccw(c38.611,70.609) 40.259,70.609 ccw(c41.907,70.609) R3.6@40.742,69.444 ; U2.35@39.873,65.405 ccw(c38.939,66.338) 40.259,66.338 ; 40.259,66.461 ccw(c41.752,66.461) U2.35@40.696,65.405 ; U2.35 40.259,64.668 R3.6 40.259,77.978 43.053,80.772 LCD1.11 ; LCD1.11@42.57,93.751 cw(c41.405,92.586) 43.053,92.586 cw(c44.701,92.586) LCD1.11@43.536,93.751
P05: LCD1.12 R3.7 U2.34 | length 40.7
  Bottom Layer w0.635: R3.7@42.316,68.478 cw(c41.151,67.313) 42.799,67.313 cw(c44.447,67.313) R3.7@43.282,68.478 ; R3.7@42.316,69.444 ccw(c40.845,70.915) 42.926,70.915 ; U2.34@42.413,65.405 ccw(c41.479,66.338) 42.799,66.338 ; 42.799,66.461 ccw(c44.292,66.461) U2.34@43.236,65.405 ; U2.34 42.799,64.668 R3.7 42.926,69.088 42.926,76.454 45.593,79.121 LCD1.12 ; 42.926,70.302 ccw(c44.14,70.302) R3.7@43.282,69.444 ; LCD1.12@45.11,93.751 cw(c43.945,92.586) 45.593,92.586 cw(c47.241,92.586) LCD1.12@46.076,93.751
P06: LCD1.13 R3.8 U2.33 | length 40.7
  Bottom Layer w0.635: R3.8@44.856,68.478 cw(c43.691,67.313) 45.339,67.313 cw(c46.987,67.313) R3.8@45.822,68.478 ; R3.8@44.856,69.444 ccw(c43.385,70.915) 45.466,70.915 ; U2.33@44.953,65.405 ccw(c44.019,66.338) 45.339,66.338 ; 45.339,66.461 ccw(c46.832,66.461) U2.33@45.776,65.405 ; U2.33 45.339,64.668 R3.8 45.466,69.088 45.466,75.057 48.133,77.724 LCD1.13 ; 45.466,70.302 ccw(c46.68,70.302) R3.8@45.822,69.444 ; LCD1.13@47.65,93.751 cw(c46.485,92.586) 48.133,92.586 cw(c49.781,92.586) LCD1.13@48.616,93.751
P07: LCD1.14 R3.9 U2.32 | length 40.7
  Bottom Layer w0.635: R3.9@47.396,68.478 cw(c46.231,67.313) 47.879,67.313 cw(c49.527,67.313) R3.9@48.362,68.478 ; R3.9@47.396,69.444 ccw(c46.231,70.609) 47.879,70.609 ccw(c49.527,70.609) R3.9@48.362,69.444 ; U2.32@47.493,65.405 ccw(c46.559,66.338) 47.879,66.338 ; 47.879,66.461 ccw(c49.372,66.461) U2.32@48.316,65.405 ; U2.32 47.879,64.668 R3.9 47.879,73.914 50.673,76.708 LCD1.14 ; LCD1.14@50.19,93.751 cw(c49.025,92.586) 50.673,92.586 cw(c52.321,92.586) LCD1.14@51.156,93.751
RS: LCD1.4 U2.28 | length 72
  Top Layer w0.635: v1(25.273,86.106) 25.298,86.131 v1(58.064,86.131) ; v1@25.498,85.881 cw(c26.101,85.278) 26.101,86.131 ; v1@25.498,86.331 ccw(c25.978,86.811) 25.978,86.131 ; v1@57.84,85.907 ccw(c57.298,85.365) 57.298,86.131 ccw(c57.298,86.898) v1@57.84,86.356
  Bottom Layer w0.635: LCD1.4@24.79,93.751 cw(c23.625,92.586) 25.273,92.586 cw(c26.921,92.586) LCD1.4@25.756,93.751 ; v1@25.048,86.331 ccw(c24.506,86.873) 25.273,86.873 ccw(c26.04,86.873) v1@25.498,86.331 ; v1(25.273,86.106) LCD1.4 ; U2.28@57.653,65.405 ccw(c56.658,66.399) 58.064,66.399 ccw(c59.471,66.399) U2.28@58.476,65.405 ; v1@57.84,85.907 cw(c57.298,85.365) 58.064,85.365 cw(c58.831,85.365) v1@58.289,85.907 ; U2.28 v1(58.064,86.131)
RST: U1.5 U2.4 | length 10.8
  Bottom Layer w0.762: U1.5@34.741,43.621 ccw(c33.623,44.739) 35.204,44.739 ; U2.4@34.837,48.686 cw(c33.951,47.8) 35.204,47.8 cw(c36.457,47.8) U2.4@35.571,48.686 ; U1.5 35.204,42.958 U2.4 ; 35.204,44.616 ccw(c36.612,44.616) U1.5@35.617,43.621
RW: LCD1.5 U2.27 | length 72
  Top Layer w0.635: v1(27.813,88.265) v1(60.579,88.265) ; v1@28.038,88.04 cw(c28.58,87.498) 28.58,88.265 cw(c28.58,89.032) v1@28.038,88.49 ; v1@60.354,88.04 ccw(c59.812,87.498) 59.812,88.265 ccw(c59.812,89.032) v1@60.354,88.49
  Bottom Layer w0.635: LCD1.5@27.33,93.751 cw(c26.165,92.586) 27.813,92.586 cw(c29.461,92.586) LCD1.5@28.296,93.751 ; v1@27.588,88.49 ccw(c27.046,89.032) 27.813,89.032 ccw(c28.58,89.032) v1@28.038,88.49 ; v1(27.813,88.265) LCD1.5 ; U2.27@60.193,65.405 ccw(c59.198,66.399) 60.604,66.399 ccw(c62.011,66.399) U2.27@61.016,65.405 ; v1@60.354,88.04 cw(c59.751,87.437) 60.604,87.437 ; v1(60.579,88.265) 60.604,88.24 U2.27 ; 60.604,87.56 cw(c61.284,87.56) v1@60.804,88.04
RXD: D1.1 U2.10 | length 41.9
  Bottom Layer w0.762: D1.1@18.407,47.251 ccw(c17.468,48.19) 18.796,48.19 ; D1.1 18.796,46.862 18.796,51.181 19.939,52.324 49.403,52.324 50.546,51.181 ; U2.10@50.09,50.132 ccw(c49.112,51.181) 50.546,51.181 ; U2.10 50.546,49.505 50.546,51.181 ; 50.546,50.761 ccw(c51.452,50.761) U2.10@50.811,50.12
SCLK: U1.7 U2.2 | length 10.9
  Bottom Layer w0.762: U2.2@29.63,48.686 cw(c28.744,47.8) 29.997,47.8 cw(c31.25,47.8) U2.2@30.364,48.686 ; U1.7@29.741,43.621 ccw(c29.123,44.239) 29.997,44.239 ; 29.997,45.116 ccw(c32.112,45.116) U1.7@30.617,43.621 ; U2.2 29.997,43.115 U1.7
TXD: J2.3 U2.11 | length 57.9
  Bottom Layer w0.762: J2.3 15.773,49.555 16.764,50.546 16.764,53.213 17.78,54.229 51.943,54.229 52.984,53.188 U2.11 ; J2.3@7.6,49.118 cw(c8.657,48.061) 8.657,49.555 cw(c8.657,51.05) J2.3@7.6,49.993 ; U2.11@52.617,50.12 ccw(c51.731,51.006) 52.984,51.006 ccw(c54.237,51.006) U2.11@53.351,50.12
VCC: C1.1 LCD1.2 LCD1.15 Q1.E R3.1 R5.1 SW1.2 U1.1 U2.31 U2.40 U3.3 | length 389.8
  Bottom Layer w0.762: U3.3@16.707,30.169 cw(c15.651,29.113) 17.145,29.113 cw(c18.639,29.113) 17.583,30.169 cw(c18.639,29.113) 18.639,30.607 cw(c18.639,32.101) 17.583,31.045 cw(c18.639,32.101) 17.145,32.101 cw(c15.651,32.101) U3.3@16.707,31.045 ; 17.864,40.089 cw(c18.937,39.016) R5.1@19.062,40.529 ; R5.1@19.488,39.948 cw(c20.544,38.892) 20.544,40.386 cw(c20.544,41.88) R5.1@19.488,40.824 ; LCD1.2@19.777,94.693 ccw(c18.926,95.631) 20.193,95.631 ; LCD1.2 20.193,95.631 ; LCD1.2@20.609,94.693 cw(c21.46,95.631) 20.193,95.631 ; SW1.2 22.809,6.299 23.749,7.239 23.749,29.21 22.352,30.607 U3.3 ; SW1.2@21.672,5.862 cw(c22.729,4.805) 22.729,6.299 cw(c22.729,7.794) SW1.2@21.672,6.737 ; R3.1@27.121,68.523 cw(c26.065,67.467) 27.559,67.467 cw(c29.053,67.467) R3.1@27.997,68.523 ; U2.40@27.217,63.926 cw(c26.331,63.04) 27.584,63.04 cw(c28.837,63.04) U2.40@27.951,63.926 ; U2.40@27.217,64.276 ccw(c26.331,63.39) 26.331,64.643 ccw(c26.331,65.896) U2.40@27.217,65.01 ; U2.40@27.217,65.36 ccw(c26.393,66.185) 27.559,66.185 ; U1.1@27.241,34.995 ccw(c26.185,33.939) 26.185,35.433 ccw(c26.185,36.927) U1.1@27.241,35.871 ; U1.1@27.241,36.121 ccw(c26.185,37.177) 27.679,37.177 ccw(c29.173,37.177) U1.1@28.117,36.121 ; 27.559,66.307 ccw(c28.899,66.307) U2.40@27.951,65.36 ; R3.1 27.559,64.668 U2.40 ; C1.1@44.901,40.837 cw(c43.845,39.781) 45.339,39.781 cw(c46.833,39.781) C1.1@45.777,40.837 ; C1.1 45.339,22.86 44.069,21.59 39.37,21.59 38.227,22.733 38.227,36.957 36.957,38.227 28.575,38.227 27.679,37.331 U1.1 24.638,35.433 23.749,36.322 23.749,39.497 22.86,40.386 R5.1 18.161,40.386 17.145,39.37 U3.3 ; U2.31@50.077,65.36 ccw(c49.191,66.246) 50.444,66.246 ccw(c51.697,66.246) U2.31@50.811,65.36 ; 50.419,62.979 cw(c51.759,62.979) 50.811,63.926 ccw(c51.697,63.04) 50.444,63.04 ccw(c49.191,63.04) 50.077,63.926 cw(c49.253,63.101) 50.419,63.101 ; LCD1.15@52.775,93.796 cw(c51.719,92.74) 53.213,92.74 cw(c54.707,92.74) LCD1.15@53.651,93.796 ; LCD1.15@52.775,94.672 ccw(c51.719,95.728) 53.213,95.728 ccw(c54.707,95.728) LCD1.15@53.651,94.672 ; Q1.E@86.049,45.904 ccw(c84.993,46.96) 86.487,46.96 ccw(c87.981,46.96) Q1.E@86.925,45.904 ; Q1.E 86.487,60.579 85.344,61.722 51.562,61.722 50.444,62.84 U2.31 ; U3.3 17.145,26.289 15.621,24.765 3.81,24.765 2.286,26.289 2.286,63.119 3.81,64.643 U2.40 ; 20.193,95.631 21.463,96.901 52.07,96.901 53.213,95.758 LCD1.15 53.213,75.946 50.444,73.177 U2.31 ; U2.40 27.584,62.713 28.575,61.722 49.403,61.722 50.419,62.738 50.419,64.618 U2.31
pads on no net: J1. SW1.3 SW1.4 SW1.5 SW1.6 U2.5 U2.6 U2.7 U2.8 U2.17 U2.22 U2.23 U2.24 U2.25 U2.29 U2.30

## Keep-outs
Keep-Out Layer:
  the board outline again, w0.254

## Silkscreen, mask and mechanical layers (free items; w line width, h text height)
Mechanical 1:
  lines w0.254: -4.597,1.459 -4.089,-0.065 ; -4.597,98.411 -4.089,99.935 ; -4.343,-0.065 -3.835,-0.065 ; -4.343,99.935 -3.835,99.935 ; -4.089,44.196 -4.089,-0.065 ; -4.089,55.673 -4.089,99.935 ; -3.581,1.459 -4.089,-0.065 ; -3.581,98.411 -4.089,99.935 ; 0.062,-3.404 0.062,-2.896 ; 1.586,-3.658 0.062,-3.15 ; 1.586,-2.642 0.062,-3.15 ; 44.323,-3.15 0.062,-3.15 ; 55.8,-3.15 100.062,-3.15 ; 98.538,-3.658 100.062,-3.15 ; 98.538,-2.642 100.062,-3.15 ; 100.062,-3.404 100.062,-2.896
  text "100 (mm)" at -3.175,44.45 h1.52 r90
  text "100 (mm)" at 44.577,-4.064 h1.52